# Altium PCB PCB1.PcbDoc
Units mm, origin at the board's own origin, x right, y up, seen from the top; angles counter-clockwise.
Board outline 111.9 x 47 mm, 4 copper layers (Top Layer, GND, 3V3, Bottom Layer), stack 1.536 mm thick; 82 components, 56 nets, 321 pads, 77 vias.
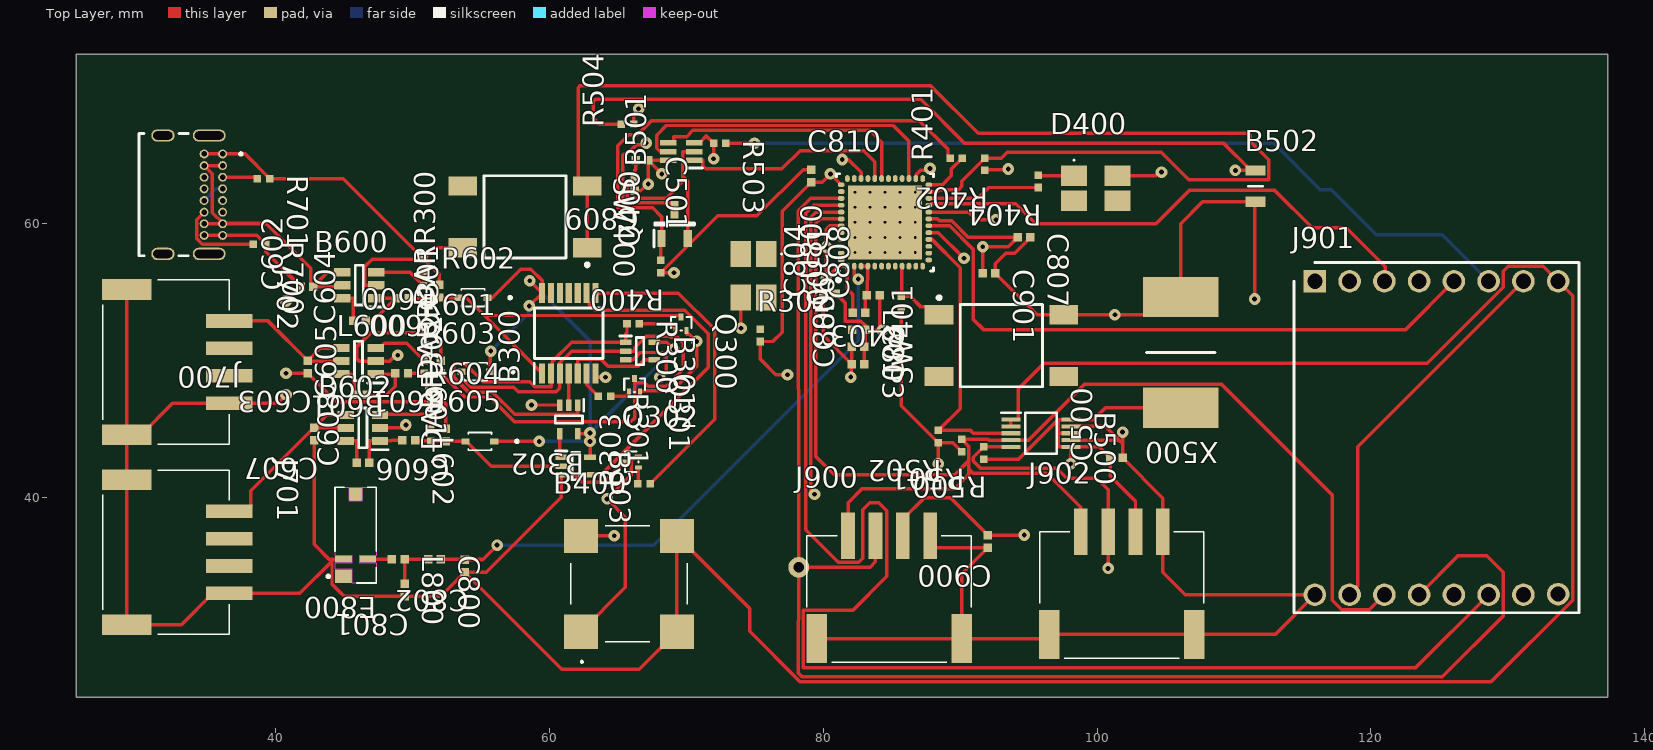
[diagram p0: Top Layer view]
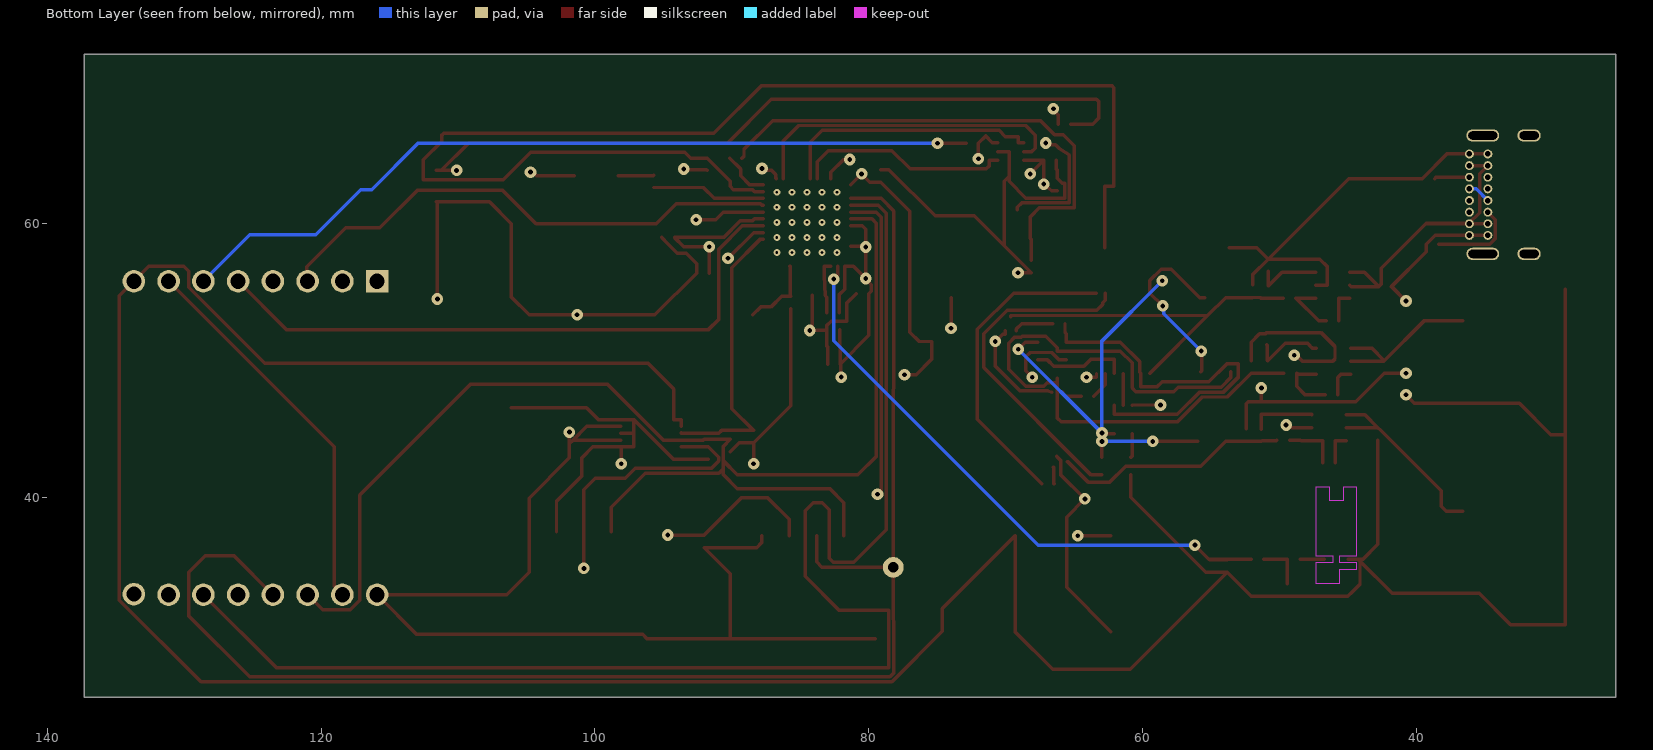
[diagram p1: Bottom Layer view, seen from below]
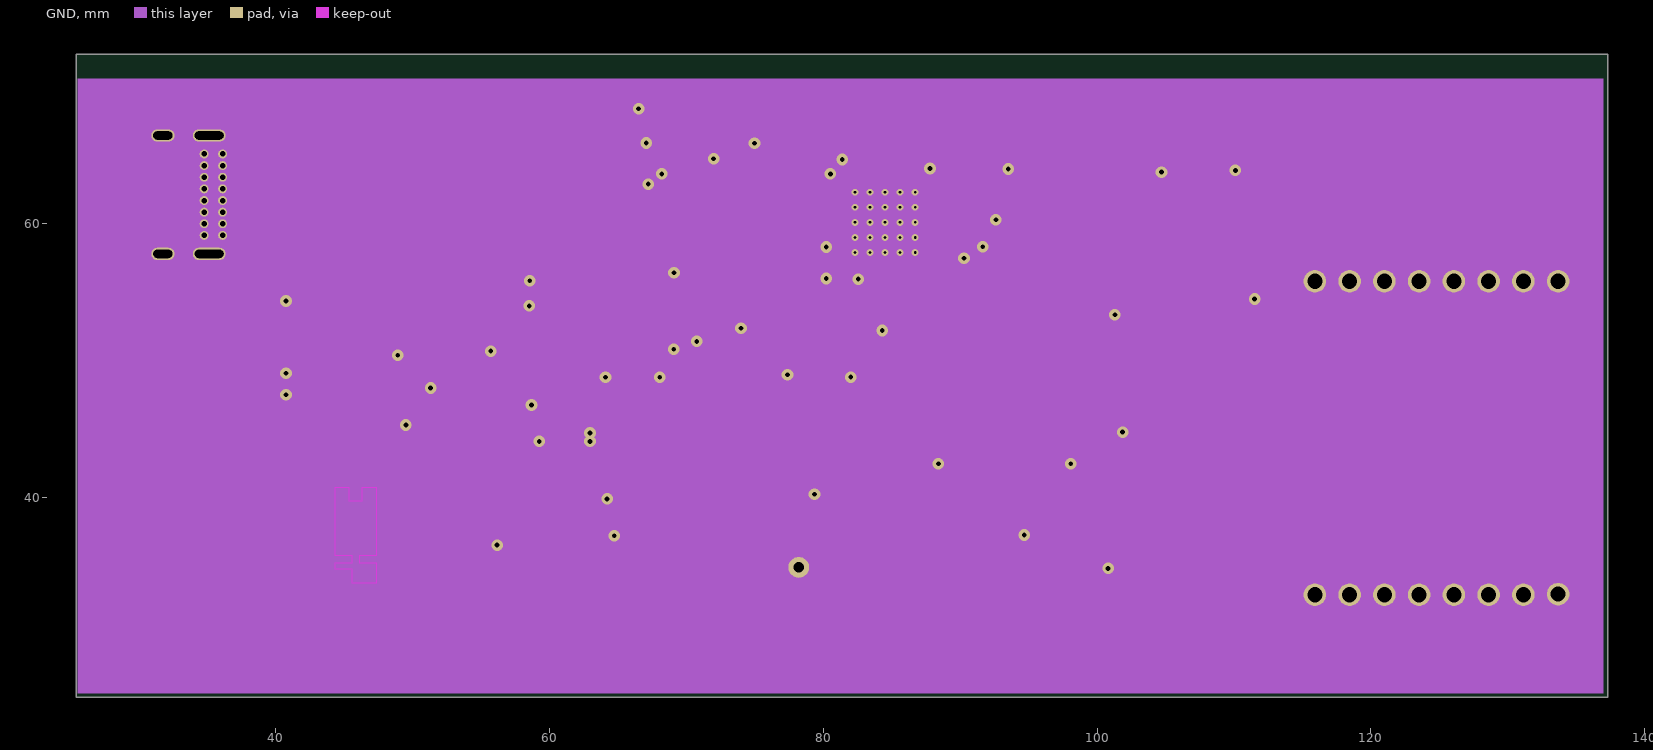
[diagram p2: GND]
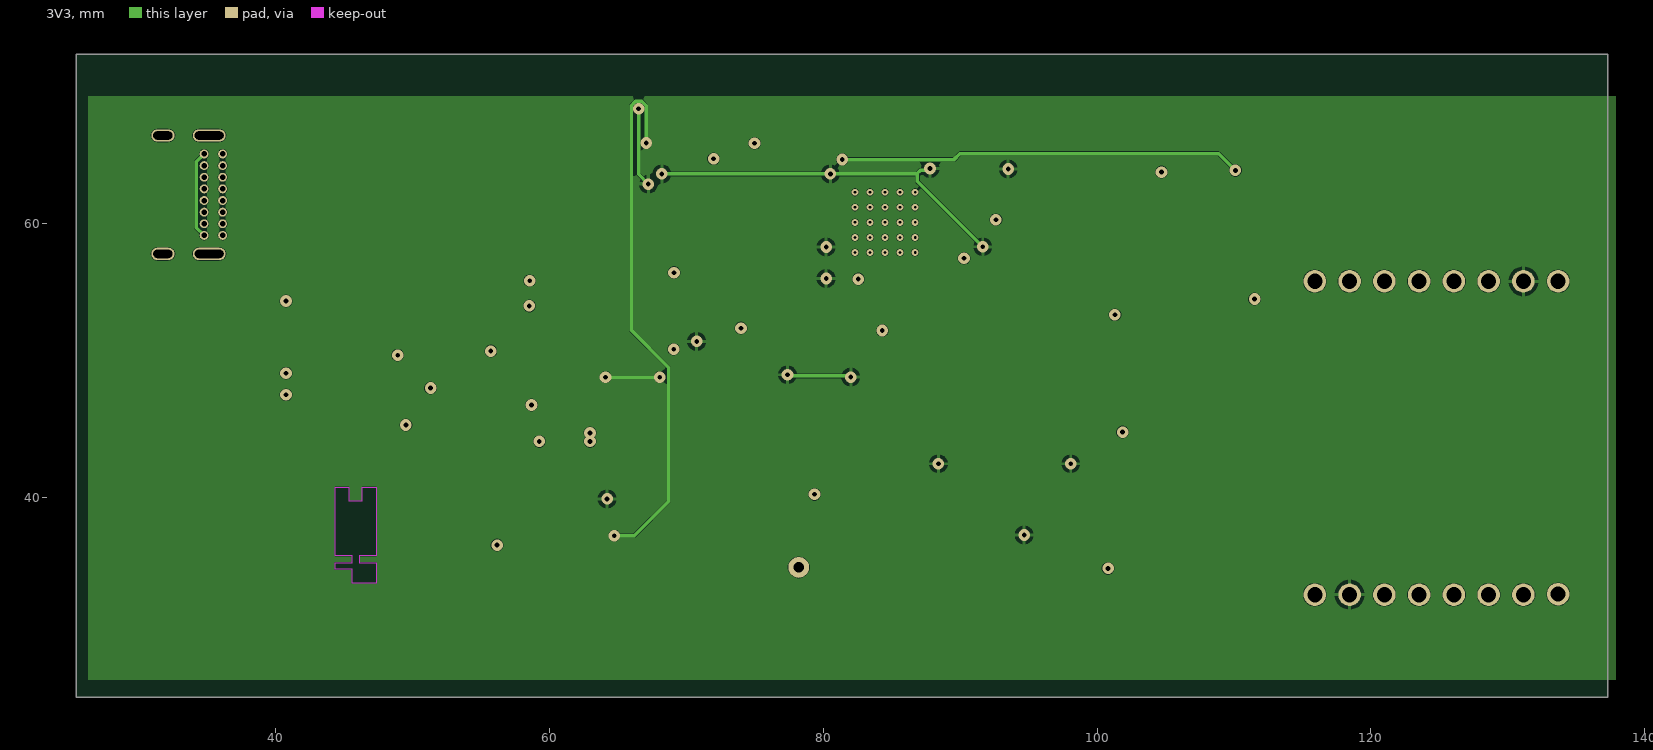
[diagram p3: 3V3]
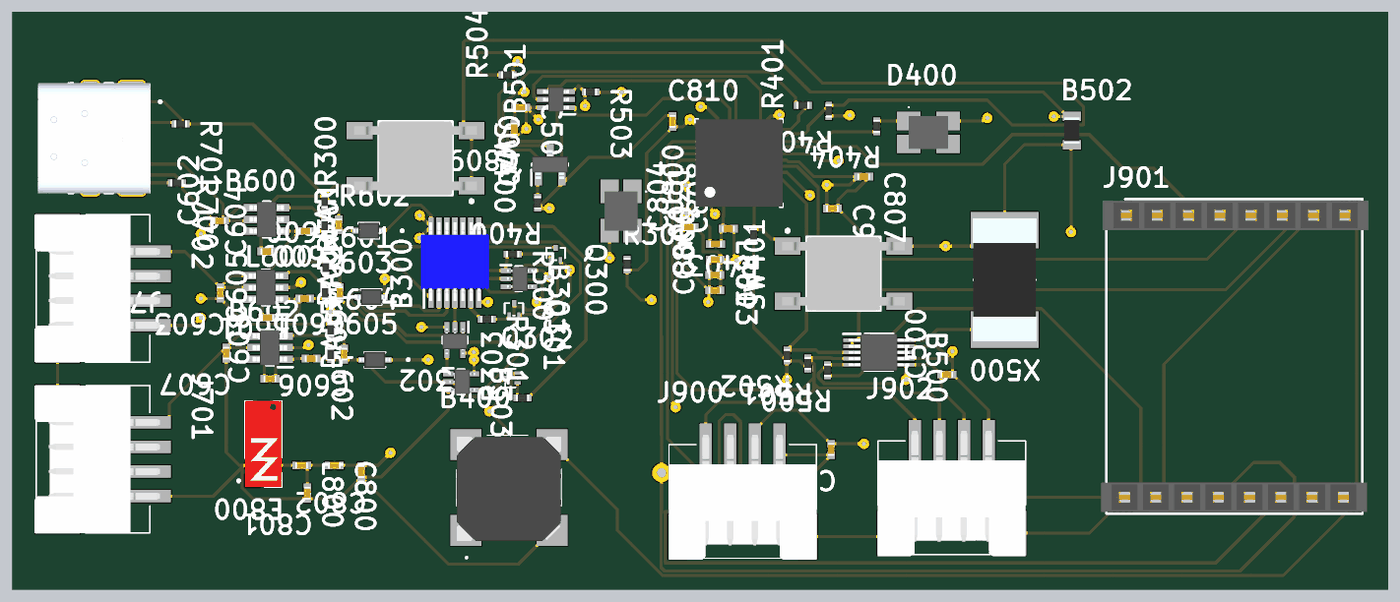
[diagram p4: 3D render of the assembled board from above, using the file's embedded part models]

## Layer stack, top to bottom
Top Solder: solder mask 0.0102, SM-001, Dk 3.5
Top Layer: signal copper 0.018
Dielectric 1: prepreg 0.36, FR-4, Dk 4.8
GND: signal copper 0.035
Dielectric 2: core 0.71, FR-4, Dk 4.8
3V3: signal copper 0.035
Dielectric 3: prepreg 0.36, FR-4, Dk 4.8
Bottom Layer: signal copper 0.018
Bottom Solder: solder mask 0.0102, SM-001, Dk 3.5

## Board outline
25.4,25.4 137.3,25.4 137.3,72.4 25.4,72.4

## Design rules (kind name [scope] priority, off if disabled: settings)
Clearance [All] p1: gap=0 ignorepadtopadclearanceinfootprint=TRUE
Creepage [All] p1: checkdistance=0 applytopolygonpour=TRUE
HoleSize [All] p1: absolutevalues=TRUE maxlimit=4 minlimit=0 maxpercent=80.000 minpercent=20.000
HoleToHoleClearance [All] p1: gap=0 allowstackedmicrovias=TRUE
MinimumSolderMaskSliver [All] p1: minsoldermaskwidth=0
PolygonConnect [All] p1: connectstyle=Relief reliefconductorwidth=0.254 reliefentries=4 polygonreliefangle="90 Angle" airgapwidth=0.254
RoutingVias [All] p1: holewidth=0.35 width=0.85 viastyle="Through Hole" minholewidth=0.35 minwidth=0.85 maxholewidth=0.35 maxwidth=0.85
ShortCircuit [All] p1: allowed=TRUE
SilkToSilkClearance [All] p1: silktosilkclearance=0
SilkToSolderMaskClearance [IsPad] p1: minsilkscreentomaskgap=0 clearancetoexposedcopper=TRUE
SolderMaskExpansion [All] p1: expansion=0.102 istentingtop=FALSE
SupplyNets "Schematic Supply Nets_10" [InNet('3v3BT')] p1: voltage=0.000
SupplyNets "Schematic Supply Nets_9" [InNet('3v3HT')] p2: voltage=0.000
SupplyNets "Schematic Supply Nets_8" [InNet('3v3USB')] p3: voltage=0.000
SupplyNets "Schematic Supply Nets_7" [InNet('VBT')] p4: voltage=0.000
SupplyNets "Schematic Supply Nets_6" [InNet('3V3')] p5: voltage=0.000
SupplyNets "Schematic Supply Nets_3" [InNet('VCC')] p6: voltage=0.000
SupplyNets "Schematic Supply Nets_2" [InNet('VHT')] p7: voltage=0.000
SupplyNets "Schematic Supply Nets_1" [InNet('VUSB')] p8: voltage=0.000
SupplyNets "Schematic Supply Nets" [InNet('GND')] p9: voltage=0.000
Width [All] p1: maxlimit=0.254 minlimit=0.254 preferedwidth=0.254
24 further rules are at their usual default settings.

## Classes and differential pairs
component class Sources: J700 J701 J702 R700 R701
component class PorteLogique: B300 B301 B302 B303 D300 DARR300 DARR301 DARR302 Q300 Q301 Q302 R300 R301 R302 R303
component class Mesure: B500 B501 B502 C500 C501 R500 R501 R502 R503 R504 X500
component class "MCU et Communication": C800 C801 C802 C803 C804 C805 C806 C807 C808 C809 C810 E800 L800 L801 U800
component class IHM: B400 D400 LS400 Q400 R400 R401 R402 R403 R404 SW400 SW401
component class Extensibilite: C900 C901 J900 J901 J902
component class Alimentation: B600 B601 B602 C600 C601 C602 C603 C604 C605 C606 C607 C608 L600 L601 L602 R600 R601 R602 R603 R604 R605

## Components (designator, comment, footprint, x,y, rotation, side; value= is the part's Value field where it differs from the comment)
B300 "74VHC05FT" SOP65P640X120-14N 61.4,52 r90 top
B301 "MC74VHC1GT08DFT2G" SOT65P210X110-5N 66.6,50.7 r0 top
B302 "MC74VHC1GT08DFT2G" SOT65P210X110-5N 61.4,45.7 r270 top
B303 "MC74VHC1GT08DFT2G" SOT65P210X110-5N 61.9,42.3 r0 top
B400 "CMT-8503-85B-SMT-TR" CMT850385BSMTTR 65.8,33.7 r0 top
B500 "INA237AIDGST" SOP50P490X110-10N 95.893,44.7 r0 top
B501 "TMP126DCKR" SOT65P210X110-6N 69.623,65.279 r180 top
B502 "NB12K00103JBB" RESC2212X50N 111.569,62.75 r90 top
B600 "LMR50410Y3FQDBVRQ1" SOT95P280X145-6N 46.089,55.516 r180 top
B601 "LMR50410Y3FQDBVRQ1" SOT95P280X145-6N 46.035,49.974 r180 top
B602 "LMR50410Y3FQDBVRQ1" SOT95P280X145-6N 46.358,45.087 r180 top
C500 "0.1µF" CAPC1005X06N 101.4,42.9 r180 top
C501 "0.1µF" CAPC1005X06N 66.749,64.633 r0 top
C600 "10µF" CAPC1005X06N 51.951,55.074 r270 top
C601 "10µF" CAPC1005X06N 52.05,49.545 r270 top
C602 "2.2µF" CAPC1005X06N 42.259,55.415 r180 top
C603 "2.2µF" CAPC1005X06N 42.321,49.545 r270 top
C604 "0.1µF" CAPC1005X06N 46.109,52.915 r180 top
C605 "0.1µF" CAPC1005X06N 46.179,47.52 r180 top
C606 "10µF" CAPC1005X06N 52.4,44.56 r270 top
C607 "2.2µF" CAPC1005X06N 42.8,44.64 r270 top
C608 "0.1µF" CAPC1005X06N 46.358,42.547 r180 top
C800 "0,7pF" CAPC1005X06N 51.6,35.5 r0 top
C801 "2,2pF" CAPC1005X06N 49.4,33.24 r270 top
C802 "2,8pF" CAPC1005X06N 53.8,35 r270 top
C803 "Value" CAPC1005X06N 82.58,52.254 r0 top
C804 "0.1µF" CAPC1005X06N 80.44,54.9 r180 top
C805 "0.1µF" CAPC1005X06N 82.54,49.746 r180 top
C806 "0.1µF" CAPC1005X06N 82.54,51 r180 top
C807 "0.1µF" CAPC1005X06N 94.64,59 r0 top
C808 "0.1µF" CAPC1005X06N 83.64,54.763 r180 top
C809 "0.1µF" CAPC1005X06N 66.229,62.879 r270 top
C810 "0.1µF" CAPC1005X06N 79.1,63.5 r90 top
C900 "0,1uF" CAPC1005X06N 92,36.8 r270 top
C901 "0,1uF" CAPC1005X06N 92.1,56.4 r0 top
D300 "598-8610-207F" 5988610207F 74.9,56.2 r270 top
D400 "598-8610-207F" 5988610207F 99.9,62.6 r0 top
DARR300 "SD103AWS-7-F" SD103AWS-7-F 54.4,54.6 r180 top
DARR301 "SD103AWS-7-F" SD103AWS-7-F 54.6,49.2 r180 top
DARR302 "SD103AWS-7-F" SD103AWS-7-F 54.9,44.1 r180 top
E800 "NN03-320" XCVR_NN03-320 45.825,37.25 r270 top
J700 "Use" USB4085-GF-A 31.746,62.125 r270 top
J701 "114020164" 114020164 32.8,36 r270 top
J702 "114020164" 114020164 32.8,49.9 r270 top
J900 "114020164" 114020164 84.8,33.4 r0 top
J901 "825433-8" Connect-Mikronus 115.9,55.8 r0 top
J902 "114020164" 114020164 101.8,33.7 r0 top
L600 "4.7µH" LQPC1005X06N 52.03,57.36 r0 top
L601 "4.7µH" LQPC1005X06N 51.985,51.879 r0 top
L602 "4.7µH" LQPC1005X06N 52.502,46.992 r0 top
L800 "0,7nH" LQPC1005X06N 51.734,38.294 r0 top
L801 "2.0nH" LQPC1005X06N 85.394,56.303 r0 top
Q300 "SI3139K-TP" SI3139K-TP 69.6,52.7 r0 top
Q301 "SI3139K-TP" SI3139K-TP 66.2,48.2 r0 top
Q302 "SI3139K-TP" SI3139K-TP 66,42.6 r90 top
Q400 "2N7002KT1G" SOT96P237X111-3N 69.129,59.979 r90 top
R300 "10k" RESC1005X06N 66.1,52.7 r0 top
R301 "10k" RESC1005X06N 64,47.4 r0 top
R302 "60" RESC1005X06N 75.4,51.85 r90 top
R303 "10k" RESC1005X06N 66.9,41 r180 top
R400 "10K" RESC1005X06N 68.129,56.879 r270 top
R401 "1K" RESC1005X06N 89.7,64.8 r180 top
R402 "10K" RESC1005X06N 91.8,64.35 r270 top
R403 "10K" RESC1005X06N 85.7,54.25 r270 top
R404 "1K" RESC1005X06N 95.7,63.1 r270 top
R500 "10K" RESC1005X06N 91.7,43.25 r270 top
R501 "10K" RESC1005X06N 90.1,43.8 r270 top
R502 "10K" RESC1005X06N 88.4,44.45 r270 top
R503 "10K" RESC1005X06N 72.429,65.879 r0 top
R504 "Value" RESC1005X06N 65.679,67.279 r180 top
R600 "22.1k" RESC1005X06N 50.808,56.968 r90 top
R601 "22.1k" RESC1005X06N 50.9,51.6 r90 top
R602 "51k" RESC1005X06N 50.808,55.005 r90 top
R603 "51k" RESC1005X06N 50.845,49.535 r90 top
R604 "22.1k" RESC1005X06N 51.3,46.55 r90 top
R605 "51k" RESC1005X06N 51.3,44.55 r90 top
R700 "5.1k" RESC1005X06N 38.8,58.5 r0 top
R701 "5.1k" RESC1005X06N 39.1,63.3 r0 top
SW400 "FSM4JSMATR" TECO-FSM4JSMATR_V 58.2,60.5 r270 top
SW401 "FSM4JSMATR" TECO-FSM4JSMATR_V 93,51.1 r90 top
U800 "ESP32-PICO-D4" PQFN50P700X700X104_HS-49N 84.5,60.104 r90 top
X500 "PSR400ITQFF0L50" RESC10052X200N 106.1,50.6 r270 top

## Footprints (in the part's own frame and the unit in brackets; to place one, negate y for a bottom-side part, rotate by r counter-clockwise, add the part's x,y. Pads: shape width x height; smd on the part's side, far side on the other; paste and mask are expansions set on the pad)
114020164 [mm]
  rect 1x3.4 smd: 1(-3,3.8) 2(-1,3.8) 3(1,3.8) 4(3,3.8)
  rect 1.5x3.6 smd: MP1(-5.3,-3.7) MP2(5.3,-3.7)
  silkscreen extent -6,-5.45 6,3.8, body extent -6,-5.59 6,4.6, height 5.2
5988610207F [mm]
  rect 1.9x1.5 smd: 1(-1.6,0.925) 2(1.6,0.925) 3(-1.6,-0.925) 4(1.6,-0.925)
  silkscreen extent -1.65,2 -1.55,2.1, body extent -1.6,-1.35 1.6,1.35, height 0.9
CAPC1005X06N [mm] "Chip Capacitor, 2-Leads, Body 1,00x0,50mm, IPC Medium Density"
  rect 0.62x0.62 smd: 1(-0.46,0) 2(0.46,0)
  body extent -0.53,-0.28 0.53,0.28, height 0.55
CMT850385BSMTTR [mm]
  rect 2.5x2.5 smd: 1(-3.5,-3.5) 4(-3.5,3.5) MP1(3.5,-3.5) MP2(3.5,3.5)
  silkscreen extent -4.25,-5.75 4.25,4.25, body extent -4.31,-4.35 4.31,4.15, height 3
Connect-Mikronus [mm]
  rect 1.65x1.65 / inner round 1.65 / far side rect 1.65x1.65 hole 1.1: 1(0,0)
  round 1.65 hole 1.1: 2(2.54,0) 3(5.08,0) 4(7.62,0) 5(10.16,0) 6(12.7,0) 7(15.24,0) 8(17.78,0) 9(17.78,-22.86) 10(15.24,-22.9) 11(12.7,-22.9) 12(10.16,-22.9) 13(7.62,-22.9) 14(5.08,-22.9) 15(2.54,-22.9) 16(0,-22.9)
  silkscreen extent -1.52,-24.22 19.3,1.37, body extent -1.95,-24.1 19.78,1.25, height 8.5
LQPC1005X06N [mm]
  rect 0.62x0.62 smd: 1(-3.254,-2.794) 2(-2.334,-2.794)
  body extent -3.32,-3.07 -2.27,-2.52, height 0.55
PQFN50P700X700X104_HS-49N [mm] "PQFN, 48-Leads, Body 7,00x7,00mm, Pitch 0,50mm, Thermal Pad 5,40x5,40mm, IPC Medium Density"
  oval 0.5x0.35 smd: 1(-3.2,2.75) 2(-3.2,2.25) 3(-3.2,1.75) 4(-3.2,1.25) 5(-3.2,0.75) 6(-3.2,0.25) 7(-3.2,-0.25) 8(-3.2,-0.75) 9(-3.2,-1.25) 10(-3.2,-1.75) 11(-3.2,-2.25) 12(-3.2,-2.75) 25(3.2,-2.75) 26(3.2,-2.25) 27(3.2,-1.75) 28(3.2,-1.25) 29(3.2,-0.75) 30(3.2,-0.25) 31(3.2,0.25) 32(3.2,0.75) 33(3.2,1.25) 34(3.2,1.75) 35(3.2,2.25) 36(3.2,2.75)
  oval 0.35x0.5 smd: 13(-2.75,-3.2) 14(-2.25,-3.2) 15(-1.75,-3.2) 16(-1.25,-3.2) 17(-0.75,-3.2) 18(-0.25,-3.2) 19(0.25,-3.2) 20(0.75,-3.2) 21(1.25,-3.2) 22(1.75,-3.2) 23(2.25,-3.2) 24(2.75,-3.2) 37(2.75,3.2) 38(2.25,3.2) 39(1.75,3.2) 40(1.25,3.2) 41(0.75,3.2) 42(0.25,3.2) 43(-0.25,3.2) 44(-0.75,3.2) 45(-1.25,3.2) 46(-1.75,3.2) 47(-2.25,3.2) 48(-2.75,3.2)
  rect 5.4x5.4 smd: 49(0,0)
  silkscreen extent -4.32,-3.55 3.55,3.55, body extent -3.55,-3.55 3.55,3.55, height 1.04
RESC1005X06N [mm] "Chip Resistor, 2-Leads, Body 1,00x0,50mm, IPC Medium Density"
  rect 0.55x0.55 smd: 1(-0.45,0) 2(0.45,0)
  body extent -0.53,-0.28 0.53,0.28, height 0.55
RESC2212X50N [mm]
  rect 0.75x1.45 smd: 1(-1.15,0) 2(1.15,0)
  silkscreen extent 0,-0.53 0,0.53, body extent -1.07,-0.63 1.07,0.63, height 0.5
RESC10052X200N [mm]
  rect 2.95x5.5 smd: 1(-4.05,0) 2(4.05,0)
  silkscreen extent 0,-2.5 0,2.5, body extent -5,-2.6 5,2.6, height 2
SD103AWS-7-F [mm]
  rect 0.6x0.46 smd: 1(-1.05,0) 2(1.05,0)
  silkscreen extent -2.81,-0.65 0.85,0.65, body extent -1.25,-0.65 1.25,0.65, height 1.2
SI3139K-TP [mm] "MOSFET P-Channel MOSFET"
  rect 0.28x0.5 smd paste+0 mask+0.075: 1(-0.4,-0.5) 2(0.4,-0.5)
  rect 0.36x0.5 smd paste+0 mask+0.075: 3(0,0.5)
  silkscreen extent -0.75,-0.5 0.75,0.5, body extent -0.6,-0.6 0.6,0.6, height 0.55
SOP50P490X110-10N [mm]
  rect 1.4x0.3 smd: 1(-2.2,1) 2(-2.2,0.5) 3(-2.2,0) 4(-2.2,-0.5) 5(-2.2,-1) 6(2.2,-1) 7(2.2,-0.5) 8(2.2,0) 9(2.2,0.5) 10(2.2,1)
  silkscreen extent -2.9,-1.5 1.15,1.5, body extent -2.46,-1.5 2.46,1.5, height 1.06
SOP65P640X120-14N [mm]
  rect 1.475x0.45 smd: 1(-2.938,1.95) 2(-2.938,1.3) 3(-2.938,0.65) 4(-2.938,0) 5(-2.938,-0.65) 6(-2.938,-1.3) 7(-2.938,-1.95) 8(2.938,-1.95) 9(2.938,-1.3) 10(2.938,-0.65) 11(2.938,0) 12(2.938,0.65) 13(2.938,1.3) 14(2.938,1.95)
  silkscreen extent -3.67,-2.5 1.85,2.52, body extent -3.1,-2.75 3.3,2.75, height 1.1
SOT65P210X110-5N [mm]
  rect 0.85x0.4 smd: 1(-1.05,0.65) 2(-1.05,0) 3(-1.05,-0.65) 4(1.05,-0.65) 5(1.05,0.65)
  silkscreen extent -1.48,-1 0.27,1.1, body extent -0.95,-1 1.15,1, height 1.1
SOT65P210X110-6N [mm]
  rect 1.2x0.4 smd: 1(-0.95,0.65) 2(-0.95,0) 3(-0.95,-0.65) 4(0.95,-0.65) 5(0.95,0) 6(0.95,0.65)
  silkscreen extent -1.55,1.2 -0.35,1.2, body extent -1.05,-1 1.05,1, height 1
SOT95P280X145-6N [mm]
  rect 1.2x0.6 smd: 1(-1.25,0.95) 2(-1.25,0) 3(-1.25,-0.95) 4(1.25,-0.95) 5(1.25,0) 6(1.25,0.95)
  silkscreen extent -1.85,-1.45 0.3,1.6, body extent -1.4,-1.45 1.4,1.45, height 1.2
SOT96P237X111-3N [mm]
  rect 1.25x0.6 smd: 1(-1.05,0.955) 2(-1.05,-0.955) 3(1.05,0)
  silkscreen extent -1.68,-1.46 0.07,1.5, body extent -1.18,-1.46 1.18,1.46, height 1.11
TECO-FSM4JSMATR_V [mm] "SMD, 4-Leads, Body 6x6mm, Pitch 4.5mm"
  rect 1.4x2.1 smd: 1(2.25,4.55) 2(2.25,-4.55) 3(-2.25,4.55) 4(-2.25,-4.55)
  silkscreen extent -3,-3 3.62,4.68, body extent -3,-5 3,5, height 5.08
USB4085-GF-A [mm]
  round 0.65 hole 0.4: A1(-2.975,4.36) A4(-2.125,4.36) A5(-1.275,4.36) A6(-0.425,4.36) A7(0.425,4.36) A8(1.275,4.36) A9(2.125,4.36) A12(2.975,4.36) B1(2.975,3.01) B4(2.125,3.01) B5(1.275,3.01) B6(0.425,3.01) B7(-0.425,3.01) B8(-1.275,3.01) B9(-2.125,3.01) B12(-2.975,3.01)
  oval 0.9x1.7 hole 0.6 slot 1.4 at 90 deg: S1(-4.325,0) S2(4.325,0)
  oval 0.9x2.4 hole 0.6 slot 2.1 at 90 deg: S3(-4.325,3.38) S4(4.325,3.38)
  silkscreen extent -4.47,-1.74 4.47,5.8, body extent -4.47,-4.25 4.47,4.92, height 3.46
XCVR_NN03-320 [mm]
  rect 1x1 smd: 1(-3,0)
  rect 0.5x1.25 smd: 2(1.75,-0.875) 4(1.75,0.875)
  rect 1x1.25 smd: 3(3,-0.875)
  Keep-Out Layer region: 3.5,-0.25 2.5,-0.25 2.5,-1.5 2,-1.5 2,-0.25 1.5,-0.25 1.5,-1.5 -3.5,-1.5 -3.5,-0.5 -2.5,-0.5 -2.5,0.5 -3.5,0.5 -3.5,1.5 1.5,1.5 1.5,0.25 2,0.25 2,1.5 3.5,1.5
  silkscreen extent -3.5,-2.1 3.5,1.5, body extent -3.5,-1.5 3.5,1.5, height 2.02

## Part data
B300: "Logic Gates CMOS LOGIC IC INVERTER", Manufacturer_Name=Toshiba, Mouser Part Number=757-74VHC05FT, Manufacturer_Part_Number=74VHC05FT
B301 B302 B303: "Single 2-Input AND Gate, TTL Level", Manufacturer_Name=onsemi, Manufacturer_Part_Number=MC74VHC1GT08DFT2G
B400: "Speakers & Transducers buzzer, 8.5 mm, 3 mm deep, M, 3.6 V, 85 dB, Surface Mount (SMT), Audio Transducer", Manufacturer_Name="Same Sky", Mouser Part Number=490-CMT-850385BSMTTR, Manufacturer_Part_Number=CMT-8503-85B-SMT-TR
B500: "Current Sense Amplifiers 85-V, 16-bit, I2C output current/voltage/power monitor with alert 10-VSSOP -40 to 125", Manufacturer_Name="Texas Instruments", Mouser Part Number=595-INA237AIDGST, Manufacturer_Part_Number=INA237AIDGST
B501: "Board Mount Temperature Sensors +/-0.25 C SPI temperature sensor with 175 C operation, CRC and slew-rate alert", Manufacturer_Name="Texas Instruments", Mouser Part Number=595-TMP126DCKR, Manufacturer_Part_Number=TMP126DCKR
B502: "NTC SMD Thermistor, NB12K, 10K, 5% AVX 10k 0805 Protection NTC Thermistor, 5s, 2 x 1.25 x 1.3mm", Manufacturer_Name="Kyocera AVX", Mouser Part Number=581-NB12K00103JBB, Arrow Part Number=NB12K00103JBB, Arrow Price/Stock=https://www.arrow.com/en/products/nb12k00103jbb/avx, Datasheet Link=https://datasheet.datasheetarchive.com/originals/distributors/Datasheets-DGA6/551314.pdf, Geometry.Height=0.5mm, Manufacturer_Part_Number=NB12K00103JBB, Mouser Price/Stock=https://www.mouser.co.uk/ProductDetail/AVX/NB12K00103JBB/?qs=4%252B6%252BTdINQeDPvI%252BQUQjJ3Q%3D%3D
B600 B601 B602: "Régulateurs de tension de commutation Automotive qualified SIMPLE SWITCHER 4-V to 36-V, 1-A synchronous step-down converter 6-SOT-23 -40 to 150", Manufacturer_Name="Texas Instruments", Mouser Part Number=595-R50410Y3FQDBVRQ1, Manufacturer_Part_Number=LMR50410Y3FQDBVRQ1
C500 C501 C600 C601 C602 C603 C604 C605 C606 C607 C608 C800 C801 C802 C803 C804 C805 C806 C807 C808 C809 C810 C900 C901: library part Capacitor
D300 D400: "Standard LEDs - SMD Red/Green WC 80/50mcd 645/570nm", Manufacturer_Name=Dialight, Mouser Part Number=645-598-8610-207F, Arrow Part Number=598-8610-207F, Arrow Price/Stock=https://www.arrow.com/en/products/598-8610-207f/dialight?region=nac, Datasheet Link=https://media.digikey.com/pdf/Data%20Sheets/Dialight%20PDFs/598%20Series%201210%20Pkg%20Bi-Color.pdf, Geometry.Height=0.8mm, Manufacturer_Part_Number=598-8610-207F, Mouser Price/Stock=https://www.mouser.co.uk/ProductDetail/Dialight/598-8610-207F?qs=7JStj%2FjQ2SFuCjosqwklHQ%3D%3D
DARR300 DARR301 DARR302: "Diode Array 3 Independent Schottky 40V 175mA Surface Mount 6-TSSOP, SC-88, SOT-363"
E800: "Dual port antenna booster for GNSS, Bluetooth, 5G and UWB (1561 - 1606MHz, 2400 - 2500MHz, 3400 - 3800MHz, 3100 - 4800MHz and 6000 - 10600 MHz), signal booster", Manufacturer_Name=Ignion, Mouser Part Number=128-NN03-320, Manufacturer_Part_Number=NN03-320
J700: library part USB4085-GF-A, "Connecteurs USB USB Type C, 2.0, Rec, TH , G/F, RA , Top Mnt, T & R"
J701 J702 J900 J902: "Seeed Studio Accessories Grove Female Header - SMD-4P-2.0mm-90D-20Pcs", Manufacturer_Name="Seeed Studio", Mouser Part Number=713-114020164, Manufacturer_Part_Number=114020164
J901: library part Connect-Mikronus, "Headers & Wire Housings 8P double for connection mikrobus", Manufacturer_Name="TE Connectivity", Mouser Part Number=571-825433-8, Manufacturer_Part_Number=825433-8
L600 L601 L602 L800 L801: library part Bobine
Q300 Q301 Q302: "MOSFET P-Channel MOSFET"
Q400: "MOSFET N-Ch 60V 380mA Small Signal SOT23 ON Semiconductor 2N7002KT1G N-channel MOSFET Transistor, 380 mA, 60 V, 3-Pin SOT-23", Manufacturer_Name=onsemi, Mouser Part Number=863-2N7002KT1G, Arrow Part Number=2N7002KT1G, Arrow Price/Stock=https://www.arrow.com/en/products/2n7002kt1g/on-semiconductor?utm_currency=USD&region=nac, Datasheet Link=http://www.onsemi.com/pub/Collateral/2N7002K-D.PDF, Geometry.Height=1.11mm, Manufacturer_Part_Number=2N7002KT1G, Mouser Price/Stock=https://www.mouser.co.uk/ProductDetail/onsemi/2N7002KT1G?qs=Jh7l0IbPjifUiTytu%252BGGDQ%3D%3D
R300 R301 R302 R303 R400 R401 R402 R403 R404 R500 R501 R502 R503 R504 R600 R601 R602 R603 R604 R605 R700 R701: library part Resistor
SW400 SW401: library part CMP-2000-07486-1, "Micro Miniature Push Button Switch FSM JSM, 50 mA, -35 to 85 degC, 4-Pin SMD, RoHS, Tape and Reel", Capacitance=0f, Case\/Package=SMD/SMT, Contact Current Rating=50mA, Contact Resistance=100mOhm, Manufacturer="TE Connectivity", Max Operating Temperature=85degC, Max Voltage Rating (DC)=12V, Min Operating Temperature=-35degC, Operating Force=160gf, Package Description="4-Pin Surface Mount Device, Body 6 x 6 mm, Pitch 4.5 mm", Package Quantity=1200, Voltage Rating (DC)=24V, Actuator Length=0.055inch, Actuator Material=Polyamide, Contact Material=CopperAlloy, Contact Plating=Silver, Current Rating=50mA, Datasheet URL=http://www.te.com/commerce/DocumentDelivery/DDEController?Action=showdoc&DocId=Customer+Drawing%7F2-1437565-7%7FV%7Fpdf%7FEnglish%7FENG_CD_2-1437565-7_V.pdf%7F4-1437565-2, Datasheet Version="Rev. V, 02/2015", Electrical Life=100000Cycles, Illumination Type=Illuminated, Manufacturer URL=http://www.te.com/, Mechanical Life=100000Cycles, Mount=SurfaceMount, Mounting Technology=SurfaceMount, Orientation=Straight, Package Reference=FSM4JSMATR, Packaging=TapeandReel, REACH SVHC=Unknown, RoHSCompliant=true, Switch Travel=0.25mm, Termination=GullWing, Throw Configuration=SPST
U800: library part ESP32, "Système RF sur puce - SoC SIP module ESP32 with 4MByte Flash, Dual Core MCU, Wi-Fi & Bluetooth Combo, LGA48-pin, 7*7mm", Manufacturer 1="Espressif Systems", Supplier Part Number 1=1904-1029-1-ND, Manufacturer Part Number 1=ESP32-PICO-D4, Supplier 1=Digi-Key
X500: "ROHM - PSR400ITQFF0L50 - SMD Current Sense Resistor, 500 ohm, PSR Series, 3921 [1052 Metric], 4 W, +/- 1%, Metal Strip", Manufacturer_Name="ROHM Semiconductor", Mouser Part Number=755-PSR400ITQFF0L50, Datasheet Link=https://componentsearchengine.com/Datasheets/2/PSR400ITQFF0L50.pdf, Geometry.Height=2mm, Manufacturer_Part_Number=PSR400ITQFF0L50, Mouser Price/Stock=https://www.mouser.co.uk/ProductDetail/ROHM-Semiconductor/PSR400ITQFF0L50?qs=493kPxzlxfLaT1w5Mo%252BtHg%3D%3D

## Free pads (board coordinates)
  round 1.524 hole 0.762: 2(78.2,34.9)

## Via types
v1: diameter 0.85, hole 0.35, Top Layer to Bottom Layer, 52 vias
v2: diameter 0.5, hole 0.2, Top Layer to Bottom Layer, 25 vias

## Nets (pads, with @x,y where several pads share a name; then routed paths per layer and width w, separated by ;. In a path a pad name is that pad's centre, name@x,y a point inside that pad or via, vN(x,y) a via of type N, cw(c..) or ccw(c..) an arc to the next point about the centre after c; other vN are vias at no path point)
3V3: B400.1 B500.6 B500.8 B500.10 B501.6 C500.2 C501.2 C803.1 C804.2 C805.2 C806.2 C807.1 C809.2 C810.1 C900.1 C901.1 J900.3 J901.7 J901.15 J902.3 L801.1 Q300.2 Q301.2 Q302.2 R302.1 R402.2 R403.2 R500.2 R501.2 R502.2 R504.1 U800.1 U800.19 U800.26 U800.37 U800.43 U800.46 X500.2 | length 289.1
  Top Layer w0.254: B400.1 65.532,33.432 65.532,38.568 v1(64.2,39.9) 65.977,41.677 65.977,42.732 66.245,43 ; R504.1 66.129,67.935 66.5,68.306 v1(66.5,68.4) ; C809.2 66.635,62.419 v1(67.209,62.899) C501.2 C501.2@67.213,64.629 ; Q301.2 66.923,47.787 68.919,47.787 70.739,49.608 v1(70.739,51.41) 70.208,51.941 70,51.941 Q300.2 ; v1(68.196,63.646) C501.2@67.213,64.629 ; B501.6 C501.2@67.213,64.629 ; v1(77.379,48.971) 76.529,48.971 75.4,50.1 R302.1 76.3,51.4 76.987,52.087 76.987,60.927 C810.1 79.902,63.04 v1(80.508,63.646) U800.37 ; U800.46 80.254,58.354 v1(80.2,58.3) ; U800.43 80.454,59.854 80.2,59.6 v1(80.2,58.3) ; U800.1@81.75,56.855 81.75,55.226 82.14,54.836 L801.1 ; U800.1 81.104,56.904 v1(80.2,56) ; v1(82,48.8) 82.04,48.84 82.04,49.706 C805.2 ; C803.1 82.12,51.04 C806.2 C805.2 ; R403.2 85.7,46.7 R502.2 ; J900.3 85.8,38.4 87.4,40 89.26,40 C900.1 v1(94.666,37.26) ; U800.26 86.75,63.319 86.768,63.337 86.768,63.598 87.098,63.928 87.675,63.928 v1(87.789,64.042) ; U800.19 88.331,60.354 88.477,60.208 89.373,60.208 90.581,59 C807.1 93.498,58.318 v1(91.643,58.318) ; v1(88.4,42.469) R502.2 ; R501.2 89.45,44 R502.2 ; C901.1 v1@91.64,58.318 ; R500.2 94.255,42.8 97.155,45.7 ; R402.2 91.85,63.95 93.45,63.95 v1(93.5,64) ; v1(98.069,42.469) B500.6@98.069,43.7 ; B500.8 97.155,44.7 ; J902.3 102.8,39.719 100.94,41.579 C500.2 100.14,43.7 B500.6 B500.6@98.069,43.7 ; X500.2 100.61,46.55 99.76,45.7 B500.10 97.155,45.7 ; J901.15 119.05,33.51 119.05,43.71 J901.7 ; v1(80.2,56) v1(80.2,58.3) ; v1(80.2,56) 80.2,55.953 79.8,55.553 79.8,55.08 C804.2 79.98,51.846 C805.2 ; 97.155,44.7 97.155,45.7 ; 97.155,44.7 97.155,43.7 B500.6@98.069,43.7
  GND w0.254: v1(64.2,39.9) 66.769,42.469 v1(88.4,42.469) v1(98.069,42.469) 108.871,42.469 114.08,37.26 ; v1(94.666,37.26) 114.08,37.26 ; J901.15 114.08,37.26
  3V3 w0.254: v1(66.5,68.4) 66.5,63.607 v1(67.209,62.899) ; v1(68.196,63.646) v1(80.508,63.646) 86.816,63.646 ; v1(77.379,48.971) 77.464,48.886 81.914,48.886 v1(82,48.8) ; v1(87.789,64.042) 87.675,63.928 87.098,63.928 86.816,63.646 ; v1(91.643,58.318) v1(91.64,58.322) 86.868,63.094 86.868,63.598 86.816,63.646
3v3BT: B300.3 B301.2 C601.2 DARR301.2 L601.2 Q301.3 R603.1 | length 47.3
  Top Layer w0.254: L601.2 R603.1 C601.2 53.789,47.346 55.626,47.346 57.429,45.542 65.938,45.542 66.2,45.804 66.2,48.387 ; DARR301.2 53.543,49.2 53.543,48.768 54.249,48.062 57.379,48.062 57.714,47.727 60.471,47.727 60.75,48.006 B300.3 60.75,49.842 61.609,50.7 B301.2 66.218,50.7 66.218,50.952 67.056,51.791 68.758,51.791 68.834,51.714 69.342,51.714 69.774,51.283 69.774,49.386 68.529,48.141 67.2,48.141 66.954,48.387 66.2,48.387 ; Q301.3 66.2,48.387
3v3HT: B303.2 C606.2 DARR302.2 L602.2 Q302.3 R605.1 | length 17.2
  Top Layer w0.254: L602.2 50.217,44.149 51.251,44.149 R605.1 C606.2 DARR302.2 53.92,44.1 55.72,42.3 B303.2 61.208,42.3 62.408,41.1 63.93,41.1 65.43,42.6 Q302.3
3v3USB: B300.1 C600.2 DARR300.2 L600.2 Q300.3 R602.1 | length 26.5
  Top Layer w0.254: L600.2 50.797,54.566 R602.1 51.333,54.555 51.392,54.614 C600.2 51.958,54.607 53.343,54.607 DARR300.2 53.912,54.6 55.208,53.304 ; B300.1 55.208,53.304 ; Q300.3 69.6,53.27 55.208,53.304
A: B300.2 B301.1 B302.1 R300.1 | length 28.8
  Top Layer w0.254: B302.1 62.05,46.076 57.446,46.076 55.814,47.708 54.07,47.708 53.01,48.768 53.01,49.759 53.848,49.759 55.143,48.463 58.547,48.463 58.928,48.082 60.1,48.082 B300.2 60.195,49.157 60.195,49.936 61.609,51.35 B301.1 65.55,51.968 65.65,52.068 R300.1
B: B300.4 B302.2 | length 2.3
  Top Layer w0.254: B302.2 B300.4
C: B300.5 B301.4 | length 7
  Top Layer w0.254: B300.5 62.05,50.114 63.754,50.114 64.262,49.606 66.485,49.606 66.929,50.05 B301.4
C-1: B300.6 R301.1 | length 2
  Top Layer w0.254: B300.6 62.7,48.25 R301.1
D: B302.4 B303.1 | length 1.8
  Top Layer w0.254: B302.4 60.75,43.023 60.823,42.95 B303.1
E: B300.9 B303.4 | length 24.9
  Top Layer w0.254: B300.9 62.7,54.425 62.898,54.228 62.898,54.106 63.327,53.677 69.879,53.677 71.6,51.956 71.6,49.5 63.75,41.65 B303.4
E-1: B300.8 R303.1 | length 23
  Top Layer w0.254: B300.8 69.406,54.938 72.057,52.286 72.057,45.707 R303.1
GND: B300.7 B301.3 B302.3 B303.3 B400.MP1 B400.MP2 B500.1 B500.2 B500.7 B500.9 B501.2 B502.1 B600.2 B601.2 B602.2 C500.1 C501.1 C600.1 C601.1 C602.2 C603.2 C606.1 C607.2 C801.2 C802.2 C803.2 C804.1 C805.1 C806.1 C807.2 C808.1 C809.1 C810.2 C900.2 C901.2 D300.4 D400.2 E800.2 J700.A1 J700.A12 J700.B1 J700.B12 J701.4 J701.MP1 J701.MP2 J702.4 J702.MP1 J702.MP2 J900.4 J900.MP1 J900.MP2 J901.8 J901.16 J902.4 J902.MP1 J902.MP2 Q400.2 R400.2 R600.2 R601.2 R604.2 R700.2 R701.2 SW400.2 SW401.2 U800.49 X500.1 | length 645.2
  Top Layer w0.254: J702.MP1 J702.MP2 ; J700.B1 J700.A12 38.6,59.15 R700.2 39.25,57.964 C602.2 v1(40.742,54.358) ; J700.B12 J700.A1 37.75,65.1 R701.2 44.926,63.3 R600.2 ; v1(40.742,47.506) 40.136,46.9 J702.4 32.45,46.9 30.15,44.6 J702.MP2 ; v1(40.742,49.085) C603.2 44.406,47 R604.2 ; C607.2 42.8,36.576 43.876,35.5 44.254,35.5 ; E800.2 44.254,35.5 ; B600.2 46.507,55.516 46.507,56.896 47.029,57.418 R600.2 ; B602.2 49.126,45.087 49.339,45.3 v1(49.5,45.3) ; v1(48.9,50.4) 48.739,50.4 48.313,49.974 B601.2 46.075,49.974 45.926,50.123 45.926,51.031 46.95,52.055 50.895,52.055 50.992,51.958 51.441,51.958 52.05,51.35 C601.1 ; v1(51.3,48) R604.2 ; C600.1 51.951,56.275 R600.2 ; C606.1 52.4,46.851 52.251,47 R604.2 ; SW400.2 51.64,58.25 R600.2 ; v1(58.674,46.761) 60.75,46.761 B302.3 ; B303.3 60.85,40.009 55.381,34.54 C802.2 ; B300.7 63.35,48.793 v1(64.084,48.793) ; B301.3 66.077,50.05 66.624,50.597 68.199,50.597 68.504,50.292 68.504,49.251 v1(68.047,48.793) ; C501.1 66.289,63.992 66.229,63.932 C809.1 65.857,62.967 65.684,62.967 65.684,61.874 68.504,61.874 69.723,63.094 69.723,63.454 ; v1(69.088,56.429) R400.2 Q400.2@70.084,58.384 ; B501.2 69.723,65.279 69.723,63.454 ; v1(73.975,52.375) D300.4 ; C810.2 78.514,63.96 75.133,60.579 72.279,60.579 Q400.2@70.084,58.384 ; J900.MP1 J900.MP2 ; C804.1 81.585,54.215 81.585,52.883 82.735,52.883 83.04,52.578 C803.2 ; C805.1 C806.1 83.04,51.04 C803.2 ; C808.1 84.1,52.561 84.3,52.361 v1(84.3,52.2) 84.273,52.227 83.067,52.227 C803.2 ; J900.4 87.8,36.713 88.173,36.34 C900.2 90.1,34.44 J900.MP2 ; B500.2 B500.1 94.234,45.7 94.234,47.93 96.114,49.809 124.104,49.809 129.667,55.372 129.667,56.519 130.044,56.896 132.584,56.896 J901.8 134.732,54.748 134.732,32.504 128.772,26.545 78.289,26.545 74.61,30.223 74.61,31.89 B400.MP2 B400.MP1 66.557,27.457 60.883,27.457 C802.2 ; C807.2 94.917,58.817 94.917,58.796 93.965,57.843 93.312,57.843 92.56,57.091 C901.2 95.61,53.35 SW401.2 v1(101.295,53.35) 104.8,53.35 X500.1 106.096,54.65 106.096,60 107.696,61.6 B502.1 111.5,61.531 v1(111.5,54.5) ; B500.7 101.584,44.2 ; B500.9 100.584,45.2 101.584,44.2 ; D400.2 104.289,63.525 104.539,63.775 v1(104.7,63.775) ; v1(101.86,44.78) 101.86,43.924 ; J902.MP2 J902.MP2@107.1,29.997 ; J702.MP2 J701.MP1 J701.MP2 33.1,30.7 35.4,33 J701.4 41.754,33 44.098,35.344 ; 44.098,35.344 44.254,35.5 ; 44.098,35.344 44.098,33.656 44.754,33 44.763,33 44.983,32.78 C801.2 52.04,32.78 C802.2 ; 69.723,63.454 70.084,63.094 Q400.2 Q400.2@70.084,58.384 ; J900.MP2 96.2,29.7 J902.MP1 96.5,29.997 J902.MP2@107.1,29.997 ; 101.584,44.2 101.86,43.924 ; 101.86,43.924 C500.1 104.8,39.96 J902.4 104.8,34.544 106.444,32.9 J901.16 112.997,29.997 J902.MP2@107.1,29.997
  GND w0.254: v1(40.742,47.506) v1(40.742,49.085) v1(40.742,54.358) ; 54.153,46.482 65.735,46.482 v1(68.047,48.793) ; v1(58.674,46.761) 60.706,48.793 v1(64.084,48.793) v1(68.047,48.793) ; v1(69.088,56.429) 68.047,55.387 68.047,51.333 ; 71.429,59.729 71.429,63.651 70.874,64.205 70.874,65.024 73.772,67.921 93.579,67.921 97.725,63.775 v1(104.7,63.775) ; 83.801,52.254 83.681,52.375 v1(73.975,52.375) 69.088,52.375 68.047,51.333 ; v1(101.295,53.35) 101.295,45.345 v1(101.86,44.78) ; v1(111.5,54.5) 126.05,54.394 ccw(c126.06,55.8) 126.158,54.397 131.213,54.751 ccw(c131.14,55.8) 131.576,54.842 J901.8 ; v1(68.047,48.793) 68.047,51.333
  3V3 w0.254: J700.B1 34.188,59.717 34.188,64.533 J700.B12 ; v1(64.084,48.793) v1(68.047,48.793)
  other v2: 82.3,57.904 83.4,57.904 84.5,57.904 85.6,57.904 86.7,57.904 82.3,59.004 83.4,59.004 84.5,59.004 85.6,59.004 86.7,59.004 82.3,60.104 83.4,60.104 84.5,60.104 85.6,60.104 86.7,60.104 82.3,61.204 83.4,61.204 84.5,61.204 85.6,61.204 86.7,61.204 82.3,62.304 83.4,62.304 84.5,62.304 85.6,62.304 86.7,62.304
"LNA OUT": C800.2 C802.1 U800.2 | length 44
  Top Layer w0.254: C800.2 55.134,35.5 ; C802.1 55.094,35.46 55.134,35.5 ; v1(56.159,36.525) 55.134,35.5 ; U800.2 82.25,56.256 v1(82.55,55.956)
  Bottom Layer w0.254: v1(56.159,36.525) 67.615,36.525 82.55,51.46 v1(82.55,55.956)
NetB400_4: B400.4 Q400.3 | length 51.3
  Top Layer w0.254: B400.4 62.3,37.211 v1(64.719,37.211) ; v1(67.052,65.9) 66.938,65.786 66.345,65.786 66.059,65.501 66.017,65.466 65.33,65.026 65.33,61.52 68.822,61.52 69.129,61.214 Q400.3
  3V3 w0.254: v1(64.719,37.211) 66.192,37.211 68.707,39.726 68.707,49.479 65.948,52.238 65.948,68.629 66.271,68.952 66.729,68.952 67.052,68.629 v1(67.052,65.9)
NetB500_3: B500.3 R502.1 U800.16 | length 21.1
  Top Layer w0.254: U800.16 87.936,58.854 89.992,56.798 89.992,46.492 R502.1 90.745,44.9 90.945,44.7 B500.3 B500.3@93.67,44.723
NetB500_4: B500.4 J900.1 J901.14 J902.1 R501.1 U800.42 | length 101.6
  Top Layer w0.254: U800.42 79.754,60.354 79.443,60.043 79.443,42.997 80.784,41.656 89.586,41.656 90.602,42.672 ; J900.1 81.8,39.624 82.816,40.64 89.586,40.64 90.602,41.656 90.602,42.113 ; J902.1 98.8,39.3 96.317,41.783 90.932,41.783 90.602,42.113 ; J901.14 119.881,31.801 117.856,31.801 117.17,32.487 117.17,40.183 109.093,48.26 99.06,48.26 95,44.2 B500.4 92.071,44.2 92.021,44.25 R501.1 90.602,43.748 90.602,42.672 ; 90.602,42.113 90.602,42.672
NetB500_5: B500.5 J900.2 J901.13 J902.2 pad.2 R500.1 U800.39 | length 154.2
  Top Layer w0.254: U800.39 79.075,61.854 78.156,60.935 pad.2 ; J900.2 83.8,35.306 83.413,34.919 79.533,34.919 pad.2 ; B500.5 R500.1 90.956,42.956 90.956,42.673 91.475,42.154 97.036,42.154 97.787,41.404 99.957,41.404 100.8,40.561 J902.2 v1(100.8,34.823) ; J901.13 126.358,35.738 128.473,35.738 129.667,34.544 129.667,31.344 125.222,26.899 78.435,26.899 78.156,27.178 pad.2
  GND w0.254: v1(100.8,34.823) 104.534,31.09 121.71,31.09 J901.13
NetB501_1: B501.1 U800.32 | length 15.8
  Top Layer w0.254: B501.1 71.2,64.629 71.2,64.205 71.397,64.008 76.962,64.008 78.3,65.346 82.939,65.346 83.75,64.535 U800.32
NetB501_3: B501.3 J901.5 R503.1 U800.18 | length 106.9
  Top Layer w0.254: B501.3 70.957,65.929 71.443,66.414 R503.1 v1(71.979,64.749) ; U800.18 89.218,59.854 90.932,58.141 90.932,53.035 91.694,52.273 122.533,52.273 J901.5
  GND w0.254: v1(71.979,64.749) 75.368,61.36 81.002,61.36 81.223,61.581 120.279,61.581 J901.5
NetB501_4: B501.4 U800.31 | length 19.2
  Top Layer w0.254: B501.4 69.063,65.929 69.063,66.37 70.002,66.37 70.458,66.826 83.388,66.826 84.25,65.964 U800.31
NetB501_5: B501.5 U800.27 | length 23.8
  Top Layer w0.254: B501.5 68.072,65.279 67.818,65.533 67.818,66.472 68.526,67.18 85.11,67.18 86.25,66.04 U800.27
NetB502_2: B502.2 R504.2 U800.34 | length 86.8
  Top Layer w0.254: R504.2 63.621,67.279 63.2,67.7 63.2,68.951 63.349,69.1 87.1,69.1 90.3,65.9 109.219,65.9 B502.2@111.219,63.9 ; v1(81.382,64.694) 81.813,64.694 82.75,63.757 U800.34 ; v1(110.1,63.9) B502.2@111.219,63.9 ; B502.2 B502.2@111.219,63.9
  3V3 w0.254: v1(81.382,64.694) 89.544,64.694 89.969,65.119 108.881,65.119 v1(110.1,63.9)
NetB600_1: B600.1 C604.1 L600.1 | length 4.3
  Top Layer w0.254: C604.1 47.125,52.915 L600.1 B600.1
NetB600_3: B600.3 R600.1 R602.2 | length 5
  Top Layer w0.254: B600.3 49.797,56.466 R602.2 R600.1
NetB600_6: B600.6 C604.2 | length 2.5
  Top Layer w0.254: B600.6 45.649,54.566 C604.2
NetB601_1: B601.1 C605.1 L601.1 | length 4.8
  Top Layer w0.254: C605.1 48.12,47.52 48.731,48.131 L601.1 48.588,49.024 B601.1
NetB601_3: B601.3 R601.1 R603.2 | length 5.4
  Top Layer w0.254: B601.3 47.585,50.924 47.758,51.097 47.758,51.11 47.907,51.259 49.572,51.259 R603.2 50.873,50.012 50.873,51.123 R601.1
NetB601_6: B601.6 C605.2 | length 2.3
  Top Layer w0.254: B601.6 45.463,49.024 45.719,48.768 C605.2
NetB602_1: B602.1 C608.1 L602.1 | length 4
  Top Layer w0.254: C608.1 46.818,44.137 B602.1 48.387,44.137 48.448,44.198 L602.1
NetB602_3: B602.3 R604.1 R605.2 | length 4.8
  Top Layer w0.254: B602.3 47.64,46.068 51.269,46.068 R604.1 R605.2
NetB602_6: B602.6 C608.2 | length 2.4
  Top Layer w0.254: B602.6 45.898,44.137 C608.2
NetC800_1: C800.1 C801.1 L800.2 | length 3.5
  Top Layer w0.254: C801.1 L800.2 C800.1
NetC808_2: C808.2 L801.2 U800.3 U800.4 | length 3.9
  Top Layer w0.254: U800.3 U800.4 83.25,56.231 C808.2 83.06,54.643 L801.2
NetD400_1: D400.1 R404.1 | length 2.6
  Top Layer w0.254: R404.1 95.725,63.525 D400.1
NetE800_4: E800.4 L800.1 | length 1.8
  Top Layer w0.254: E800.4 L800.1
NetJ700_A5: J700.A5 R701.1 | length 2.6
  Top Layer w0.254: J700.A5 38.55,63.4 R701.1
NetJ700_A6: J700.A6 J700.B6 | length 1.7
  Bottom Layer w0.254: J700.B6 35.606,62.55 J700.A6
NetJ700_A7: J700.A7 J700.B7 | length 1.7
  GND w0.254: J700.B7 35.606,61.7 J700.A7
NetJ700_B5: J700.B5 R700.1 | length 6.5
  Top Layer w0.254: J700.B5 34.204,60.298 34.204,58.921 34.625,58.5 R700.1
NetJ901_3: J901.3 U800.21 | length 38.4
  Top Layer w0.254: U800.21 87.801,61.354 87.899,61.452 94.048,61.452 95.502,59.998 104.296,59.998 106.731,62.433 112.967,62.433 115.7,59.7 118.2,59.7 121.043,56.857 121.043,55.863 J901.3
NetJ901_4: J901.4 U800.17 | length 37.3
  Top Layer w0.254: U800.17 88.398,59.354 v1(90.272,57.48)
  GND w0.254: v1(90.272,57.48) 121.84,57.48 J901.4
NetJ901_6: J901.6 R503.2 U800.20 | length 104.3
  Top Layer w0.254: R503.2 v1(74.966,65.879) ; U800.20 90.614,60.854 91.169,60.3 v1(92.6,60.3)
  GND w0.254: v1(92.6,60.3) 92.7,60.4 98.316,60.4 98.716,60 105.87,60 106.27,60.4 120.778,60.4 121.945,59.233 124.716,56.462 124.79,56.388 125.051,55.503 ccw(c126.06,55.8) 126.496,54.842 J901.6
  Bottom Layer w0.254: v1(74.966,65.879) 112.921,65.879 116.3,62.5 117.1,62.5 120.4,59.2 125.2,59.2 J901.6
NetJ901_11: J901.11 U800.40 | length 105.5
  Top Layer w0.254: U800.40 79.285,61.354 78.7,60.769 78.7,37.646 81.073,35.273 82.595,35.273 82.882,35.56 82.882,39.116 83.39,39.624 84.051,39.624 84.633,39.042 84.633,34.239 82.144,31.75 78.511,31.75 78.511,27.559 123.259,27.559 J901.11
NetJ901_12: J901.12 U800.41 | length 76
  Top Layer w0.254: v1(79.35,40.234) 79.089,40.494 79.089,60.489 79.454,60.854 U800.41
  GND w0.254: v1(79.35,40.234) 90.881,28.702 121.862,28.702 J901.12
NetQ300_1: Q300.1 R300.2 | length 2.9
  Top Layer w0.254: R300.2 68.81,52.7 69.2,52.31 Q300.1
NetQ301_1: Q301.1 R301.2 | length 1.5
  Top Layer w0.254: R301.2 65.61,47.4 65.8,47.59 Q301.1
NetQ302_1: Q302.1 R303.2 | length 1.2
  Top Layer w0.254: R303.2 66.475,41.025 66.475,42.187 66.488,42.2 Q302.1
NetQ400_1: Q400.1 R400.1 R401.2 | length 37.7
  Top Layer w0.254: R400.1 68.129,58.884 Q400.1 68.174,60.528 67.535,61.166 64.976,61.166 64.976,65.707 65.786,66.517 66.415,66.517 67.437,67.539 87.011,67.539 89.102,65.448 89.102,64.948 R401.2
NetR401_1: R401.1 U800.24 | length 3.5
  Top Layer w0.254: U800.24 88.701,62.854 89.351,63.505 89.351,64.002 R401.1
NetR402_1: R402.1 SW400.1 SW400.3 U800.23 | length 93.9
  Top Layer w0.254: SW400.1 SW400.3 62.103,62.75 62.103,69.951 62.252,70.1 87.8,70.1 91.3,66.6 111.051,66.6 111.2,66.451 111.2,66 112.522,64.678 112.522,63.221 106.68,63.221 104.673,65.227 93.423,65.227 92.996,64.8 R402.1 90.119,63.119 90.119,62.735 89.884,62.5 88.477,62.5 88.331,62.354 U800.23
NetR403_1: R403.1 SW401.1 U800.9 | length 5.5
  Top Layer w0.254: U800.9 85.732,56.886 85.732,54.732 R403.1 86.356,54.7 87.133,53.923 87.877,53.923 SW401.1
NetR404_2: R404.2 U800.22 | length 8.3
  Top Layer w0.254: U800.22 91.288,61.854 92.084,62.65 R404.2
VBT: B601.4 B601.5 C603.1 J702.1 | length 12.2
  Top Layer w0.254: J702.1 39.426,52.9 C603.1 ; B601.5 42.352,49.974 C603.1 ; B601.4 43.24,50.924 C603.1
VCC: B300.14 B301.5 B302.5 B303.5 DARR300.1 DARR301.1 DARR302.1 | length 47.8
  Top Layer w0.254: DARR300.1 55.8,54.6 57.875,56.675 58.63,56.675 59.45,55.855 B300.14 ; v1(55.7,50.7) 55.675,50.675 55.675,49.245 DARR301.1@55.72,49.2 ; DARR302.1 v1(59.244,44.1) ; v1(58.512,54) B300.14 ; v1(58.544,55.844) B300.14 ; B302.5 v1@62.95,44.65 ; B303.5 v1(62.95,44.1) v1@62.95,44.65 ; v1(62.95,44.719) v1@62.95,44.65 ; B301.5 68.546,51.35 v1(69.064,50.833)
  Bottom Layer w0.254: v1@55.538,50.538 58.44,53.44 58.44,53.928 v1(58.512,54) ; v1(58.544,55.844) 62.95,51.438 v1(62.95,44.719) v1(69.064,50.833) ; v1(59.244,44.1) v1(62.95,44.1)
VHT: B602.4 B602.5 C607.1 J701.1 | length 14.4
  Top Layer w0.254: J701.1 37.8,39 38.173,39.373 38.173,40.494 42.596,44.917 C607.1 ; B602.5 42.813,45.087 C607.1 ; B602.4 43.737,46.037 C607.1
VUSB: B600.4 B600.5 C602.1 J700.A4 J700.A9 J700.B4 J700.B9 | length 24.6
  Top Layer w0.254: J700.B4 J700.A9 39.297,60 ; J700.A4 J700.B9 35.364,63.642 35.364,60.811 36.14,60.035 39.262,60.035 39.297,60 ; B600.5 44.738,55.415 C602.1 ; B600.4 43.77,56.466 C602.1 ; 39.297,60 42.536,56.761 42.536,55.598 C602.1
pads on no net: B300.10 B300.11 B300.12 B300.13 D300.1 D300.2 D300.3 D400.3 D400.4 E800.1 E800.3 J700.A8 J700.B8 J700.S1 J700.S2 J700.S3 J700.S4 J701.2 J701.3 J702.2 J702.3 J901.1 J901.2 J901.9 J901.10 R302.2 SW400.4 SW401.3 SW401.4 U800.5 U800.6 U800.7 U800.8 U800.10 U800.11 U800.12 U800.13 U800.14 U800.15 U800.25 U800.28 U800.29 U800.30 U800.33 U800.35 U800.36 U800.38 U800.44 U800.45 U800.47 U800.48

## Polygon pours and split planes (outlines as drawn)
3V3 on 3V3 "3V3_L03_P001" (solid, pour order 1): 26.3,26.7 26.3,69.3 34.4,69.3 137.9,69.3 137.9,26.7

## Other copper
GND:
  rectangle net GND: 25.5,25.7 137,70.6

## Text inside footprints (layer, text, board x,y; h text height)
J700: Mechanical 13 "PCB EDGE" at 30.176,56.81 h0.81 r270
Q300: Mechanical 9 "SOT-723" at 67.934,52.45 h0.5
Q301: Mechanical 9 "SOT-723" at 64.534,47.95 h0.5
Q302: Mechanical 9 "SOT-723" at 66.25,40.934 h0.5 r90